# EAGLE board IgorBrain (EAGLE 7.5.0)
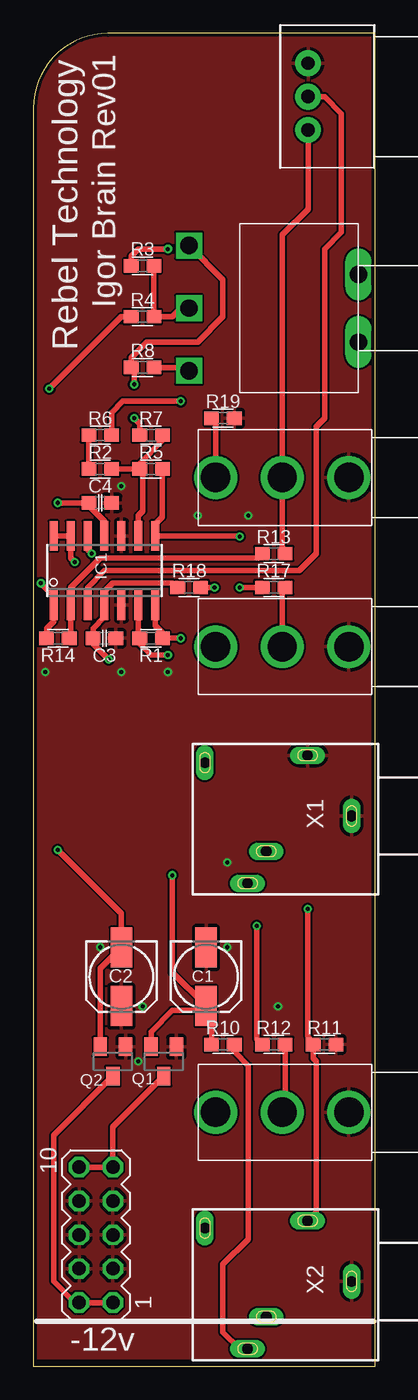
[diagram p0: board, top side]
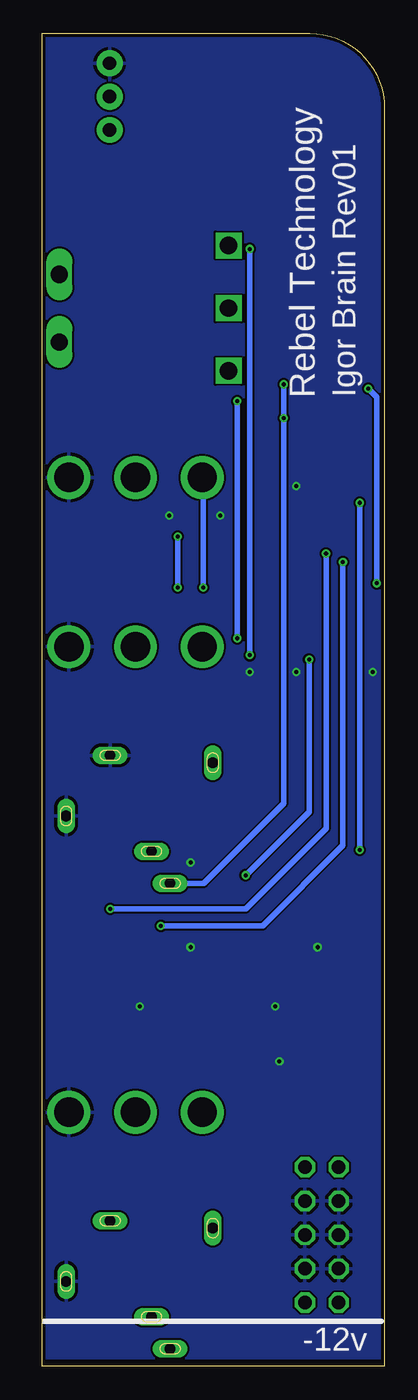
[diagram p1: board, bottom side, seen from below]

Size 25.65 x 100 mm. Coordinates in mm from the lower left corner, seen from the top.
Outline: 25.65,0 25.65,100 5.6,100 arc90 0,94.4 0,0 25.65,0
Copper layers (1*16): Top 0.035mm / dielectric 1.5mm / Bottom 0.035mm
Design rules "SeeedStudio_2layer_DRU_no_angle_20140221": minimum track width 6mil, minimum drill 12mil, track to track 6mil, track to pad 6mil, pad to pad 6mil, via to via 6mil, smd to smd 0mil, copper to edge 10mil, drill to drill 10mil, minimum pad ring 10mil, minimum via ring 6mil, stop-mask expansion 2mil, vias tented up to drill 100mil, thermal gap 10mil

## Footprints (pad centres in the part's own frame; a part is rotated, then mirrored left to right if it is on the bottom)
153CLV-0505 = smd 3 x 1.6: + 2.2,0; - -2.2,0
C0603 = smd 1.1 x 1: 1 -0.85,0; 2 0.85,0
SO14 = smd 0.6 x 2.2: 1 -3.81,-2.6; 2 -2.54,-2.6; 3 -1.27,-2.6; 4 0,-2.6; 5 1.27,-2.6; 6 2.54,-2.6; 7 3.81,-2.6; 8 3.81,2.6; 9 2.54,2.6; 10 1.27,2.6; 11 0,2.6; 12 -1.27,2.6; 13 -2.54,2.6; 14 -3.81,2.6
UJ-3502-R = drill 2.2: P$1 0,0; P$2 0,5; P$3 0,-5
POT-BOURNS-PTD901 = drill 1 pad 1.93: 1 -2.5,-0.036; 2 0,-0.036; 3 2.5,-0.036
SOT23 = smd 1 x 1.4: 1 -0.95,-1.1; 2 0.95,-1.1; 3 0,1.1
0603 = smd 1.1 x 1: 1 -0.85,0; 2 0.85,0
MA05-2 = drill 1.016 octagon: 1 -5.08,-1.27; 2 -5.08,1.27; 3 -2.54,-1.27; 4 -2.54,1.27; 5 0,-1.27; 6 0,1.27; 7 2.54,-1.27; 8 2.54,1.27; 9 5.08,-1.27; 10 5.08,1.27
SWITCH-SPDT-SALECOM-T8020 = drill 1.3 square: 1 -4.699,0; 2 0,0; 3 4.699,0 | drill 1.3 long: SHIELD1 -2.54,-12.7; SHIELD2 2.54,-12.7
1503_09 = drill 0.8 pad 1.2 long: 1 0,-2.1; 2 -4.55,-5.4; 3 5.05,-9.9; 4 -4,-13.1; 5 2.65,-8.5

## Placement (x,y rotation side)
C1  10u  [153CLV-0505]  12.95,29.21 270 top
C2  10u  [153CLV-0505]  6.6,29.21 270 top
C3  100n  [C0603]  5.33,54.61 0 top
C4  100n  [C0603]  5.02,64.77 0 top
IC1  QUAD_OPAMPD  [SO14]  5.33,59.69 0 top
IN1  JACK-UJ-3502-R  [UJ-3502-R]  18.67,66.67 90 top
OUT1  JACK-UJ-3502-R  [UJ-3502-R]  18.67,53.98 90 top
OUT2  JACK-UJ-3502-R  [UJ-3502-R]  18.67,19.05 90 top
P1  10k lin  [POT-BOURNS-PTD901]  20.57,95.25 90 top
Q1  SI2309CDS  [SOT23]  9.78,22.86 180 top
Q2  BSS123  [SOT23]  5.97,22.86 180 top
R1  10k  [0603]  8.83,54.61 180 top
R2  10k  [0603]  5.02,67.31 180 top
R3  10k  [0603]  8.19,82.55 0 top
R4  1k  [0603]  8.19,78.74 0 top
R5  22k  [0603]  8.83,67.31 180 top
R6  5k1  [0603]  5.02,69.85 0 top
R7  10k  [0603]  8.83,69.85 180 top
R8  5k1  [0603]  8.19,74.93 0 top
R10  1k  [0603]  14.22,24.13 0 top
R11  100k  [0603]  21.84,24.13 0 top
R12  1k  [0603]  18.03,24.13 0 top
R13  22k  [0603]  18.03,60.96 180 top
R14  22k  [0603]  1.84,54.61 180 top
R17  1k  [0603]  18.03,58.42 0 top
R18  10k  [0603]  11.68,58.42 0 top
R19  10k  [0603]  14.22,71.12 0 top
SV1  [MA05-2]  4.7,9.84 90 top
SW1  SWITCH-TOGGLE  [SWITCH-SPDT-SALECOM-T8020]  11.68,79.38 90 top
X1  1503_09  [1503_09]  25.97,41.27 270 top
X2  1503_09  [1503_09]  25.97,6.35 270 top

## Library data of the parts
C1 C2 = rcl
C3 C4 IN1 OUT1 OUT2 P1 R1-R8 R10-R14 R17-R19 SW1 = Rebel
IC1 = adafruit
Q1 Q2 = transistor-small-signal
SV1 = con-lstb; OC_FARNELL: unknown; OC_NEWARK: unknown
X1 X2 = con-lumberg; OC_FARNELL: 1243244; OC_NEWARK: unknown

## Nets
+12V: C1.+ C3.1 IC1.4 Q1.2 R10.1 R18.1
-12V: C2.- C4.1 IC1.11 Q2.2
GND: C1.- C2.+ C3.2 C4.2 IC1.5 IC1.10 IN1.P$3 OUT1.P$3 OUT2.P$3 P1.3 Q1.1 Q2.1 R11.2 R19.2 SV1.3 SV1.4 SV1.5 SV1.6 SV1.7 SV1.8 X1.1 X1.2 X2.1
N$1: Q2.3 SV1.1 SV1.2
N$2: R7.2 R8.1 SW1.3 X1.3
N$3: R3.2 R4.2 SW1.2
N$4: IC1.8 R5.1 R17.1
N$5: IC1.7 R1.1 R6.2
N$6: R2.2 R6.1
N$7: R8.2 SW1.1
N$8: IN1.P$1 P1.1 R13.1
N$9: IC1.2 R13.2 R14.1
N$10: IC1.1 R4.1 R14.2
N$11: IC1.9 R2.1 R5.2 R7.1
N$12: R10.2 X2.3
N$13: IC1.13 IC1.14 R12.1
N$14: Q1.3 SV1.9 SV1.10
N$15: OUT2.P$1 R12.2
N$16: IC1.12 R11.1 X2.2
N$17: IC1.3 P1.2
N$18: OUT1.P$1 R17.2
N$19: IN1.P$2 R18.2 R19.1
N$20: IC1.6 R1.2 R3.1

## Tracks (layer width: path | path; a pad name or v marks a point on that pad's centre or on a via)
+12V  (via drill 0.3)
  Top 0.406: Q1.2 8.83,25.09 10.41,26.67 12.61,26.67 C1.+ | v10.41,36.83 10.41,29.55 C1.+ | R10.1 13.37,26.59 C1.+ | R18.1 10.73,58.42 10.41,58.74 5.97,58.74 5.33,58.1 IC1.4 5.33,56.2 4.48,55.35 C3.1 4.48,54.19 v5.65,53.02
  Bottom 0.406: v5.65,53.02 5.65,41.59 v10.41,36.83
-12V  (via drill 0.3)
  Top 0.406: Q2.2 5.02,29.82 C2.- 6.6,33.97 v1.84,38.73 | v1.84,64.77 C4.1 4.17,64.56 5.33,63.4 IC1.11
  Bottom 0.406: v1.84,64.77 v1.84,38.73
GND  (via drill 0.3)
  other vias: 10.1,52.07 6.6,52.07 0.89,52.07 6.6,66.04 12.32,63.82 16.13,63.82 5.02,31.43 8.19,26.99 14.54,31.43 7.87,22.86 18.35,26.99 14.54,37.78
  pour Bottom: -11.18,0.64 28.19,0.64 28.19,100.97 -11.18,100.97
  pour Top: -9.91,0.64 26.92,0.64 26.92,100.97 -9.91,100.97
N$1
  Top 0.406: Q2.3 1.52,17.32 1.52,6.35 3.11,4.76 SV1.2 SV1.1
N$2  (via drill 0.3)
  Top 0.406: R7.2 7.98,70.7 v7.56,71.12 | v7.56,73.66 7.56,74.72 R8.1 7.34,75.67 8.51,76.83 12.32,76.83 14.22,78.74 14.22,81.53 SW1.3
  Bottom 0.406: X1.3 13.56,36.23 7.56,42.23 v7.56,71.12 v7.56,73.66
N$3
  Top 0.406: R3.2 R4.2 10.41,78.74 11.05,79.38 SW1.2
N$4  (via drill 0.3)
  Top 0.406: R5.1 9.68,63.72 9.14,63.18 IC1.8 15.43,62.29 v15.49,62.23 | v15.49,58.42 R17.1
  Bottom 0.406: v15.49,62.23 v15.49,58.42
N$5  (via drill 0.3)
  Top 0.406: IC1.7 9.14,55.56 9.68,55.03 R1.1 v11.05,54.61 | R6.2 5.87,71.54 6.72,72.39 v11.05,72.39
  Bottom 0.406: v11.05,72.39 v11.05,54.61
N$6
  Top 0.406: R2.2 R6.1
N$7
  Top 0.406: R8.2 11.43,74.93 SW1.1
N$8
  Top 0.406: P1.1 20.61,86.82 18.67,84.88 IN1.P$1 18.67,61.17 R13.1
N$9
  Top 0.406: R14.1 2.79,54.71 IC1.2 2.79,58.42 5.02,60.64 16.87,60.64 R13.2
N$10  (via drill 0.3)
  Top 0.406: R14.2 0.99,55.35 1.52,55.88 IC1.1 1.52,57.78 v0.57,58.74 | R4.1 6.6,78.74 v1.21,73.34
  Bottom 0.406: v1.21,73.34 0.57,72.71 v0.57,58.74
N$11
  Top 0.406: IC1.9 7.87,63.82 8.19,64.14 8.19,67.09 R5.2 | R2.1 R5.2 | R5.2 7.98,67.73 9.68,69.43 R7.1
N$12
  Top 0.406: X2.3 15.46,1.3 14.22,2.54 14.22,7.62 16.13,9.53 16.13,22.54 15.07,23.6 R10.2
N$13  (via drill 0.3)
  Top 0.406: v16.76,33.02 16.76,24.55 R12.1 | IC1.14 IC1.13 2.79,60.64 v3.11,60.33
  Bottom 0.406: v3.11,60.33 3.11,39.05 9.14,33.02 v16.76,33.02
N$14
  Top 0.406: SV1.10 SV1.9 5.97,17.95 Q1.3
N$15
  Top 0.406: R12.2 18.88,19.9 18.67,19.68 OUT2.P$1
N$16  (via drill 0.3)
  Top 0.406: v20.57,34.29 20.57,24.77 R11.1 20.99,23.07 21.21,22.86 21.21,11.54 X2.2 | v4.38,60.96 4.06,61.28 IC1.12
  Bottom 0.406: v20.57,34.29 10.41,34.29 4.38,40.32 v4.38,60.96
N$17
  Top 0.406: IC1.3 4.06,58.42 5.33,59.69 19.94,59.69 21.21,60.96 21.21,70.48 21.84,71.12 21.84,83.82 23.11,85.09 23.11,93.98 21.84,95.25 P1.2
N$18
  Top 0.406: OUT1.P$1 18.67,58.2 R17.2
N$19  (via drill 0.3)
  Top 0.406: IN1.P$2 13.67,70.83 R19.1 | v13.59,58.42 R18.2
  Bottom 0.406: v13.59,58.42 13.59,66.59 IN1.P$2
N$20  (via drill 0.3)
  Top 0.406: v10.1,53.34 8.83,53.34 7.98,54.19 R1.2 7.87,54.71 IC1.6 | v10.1,83.82 7.87,83.82 7.34,83.29 R3.1
  Bottom 0.406: v10.1,83.82 v10.1,53.34

## Text on the board
tPlace: Rebel Technology | Igor Brain Rev01 | -12v
bPlace: Igor Brain Rev01 | Rebel Technology | -12v